# Altium PCB 400926.PcbDoc (part 4 of 7)
Units mm, origin at the board's own origin, x right, y up, seen from the top; angles counter-clockwise.
Board outline 148.5 x 63.5 mm, 4 copper layers (Top Layer, Mid-Layer 1, Mid-Layer 2, Bottom Layer), stack 1.514 mm thick; 311 components, 281 nets, 1495 pads, 2232 vias.
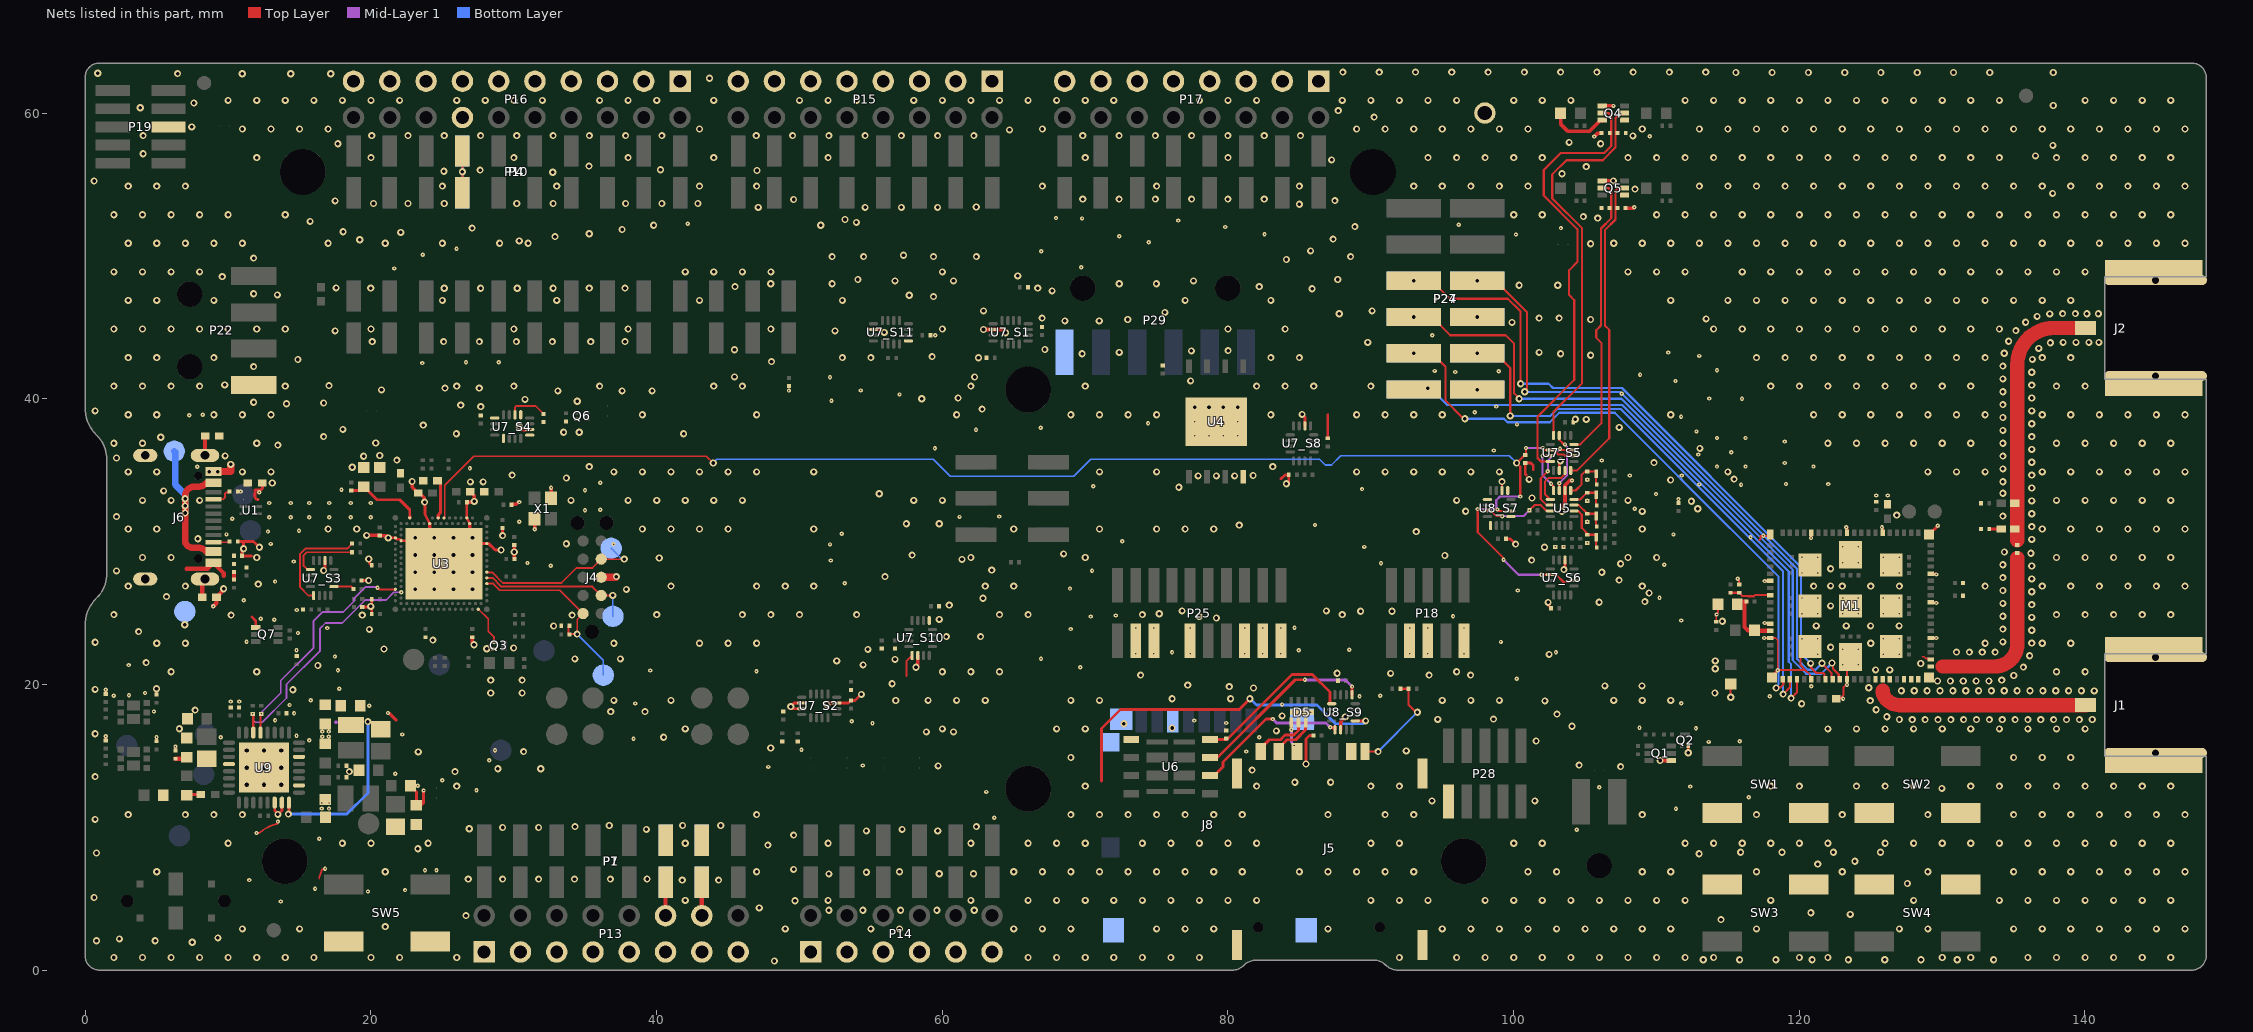
[diagram p5: the nets of this part, all layers, seen from the top]

## Via types
v1: diameter 0.5, hole 0.25, Top Layer to Bottom Layer, tented both sides, 1704 vias
v2: diameter 0.3, hole 0.1, Top Layer to Mid-Layer 1, tented top, 426 vias
v3: diameter 0.3, hole 0.1, Top Layer to Mid-Layer 1, tented both sides, 93 vias
v4: diameter 0.61, hole 0.305, Top Layer to Bottom Layer, tented both sides, 9 vias

## Nets (pads, with @x,y where several pads share a name; then routed paths per layer and width w, separated by ;. In a path a pad name is that pad's centre, name@x,y a point inside that pad or via, vN(x,y) a via of type N, cw(c..) or ccw(c..) an arc to the next point about the centre after c; other vN are vias at no path point) (continued)
GND: C1.2 C2.2 C3.2 C4.2 C5.2 C6.2 C7.2 C8.1 C9.1 C10.2 C11.1 C19.1 C24.1 C25.1 C26.2 C27.1 C28.2 C29.1 C30.2 C31.1 C32.1 C33.1 C34.2 C35.1 C36.1 C37.2 C38.2 C39.2 C40.1 C41.1 C42.1 C43.1 C44.2 C45.1 C46.1 C47.1 C48.2 C49.1 C50.1 C51.1 C52_S1.2 C52_S2.2 C52_S3.2 C52_S4.2 C52_S5.2 C52_S6.2 C52_S8.2 C52_S10.2 C52_S11.2 C53_S7.2 C53_S9.2 C54.1 C55.1 C56.1 C57.1 C58.1 C59.1 C60.1 C61.2 C62.2 C63.2 C64.1 C65.1 C66.1 C67.1 C68.1 C69.1 C70.1 C71.1 C72.1 D5.9 J1.2 J2.2 J4.3 J5.0 J5.C5 J6.A1 J6.A12 J8.0 J8.6 J8.9 M1.1 M1.7 M1.13 M1.15 M1.20 M1.25 M1.30 M1.34 M1.36 M1.38 M1.39 M1.40 M1.41 M1.43 M1.46 M1.51 M1.55 M1.60 M1.66 M1.71 M1.76 M1.105 M1.106 M1.107 M1.108 M1.109 M1.110 M1.111 M1.112 M1.113 P1.6 P1.7 P4.7 P7.6 P7.7 P10.7 P13.1 P13.3 P13.5 P13.7 P13.9 P13.11 P13.12 P13.13 P13.14 P13.15 P14.1 P14.3 P14.5 P14.7 P14.9 P14.11 P15.1 P15.3 P15.5 P15.7 P15.9 P15.11 P15.13 P15.15 P16.1 P16.3 P16.5 P16.7 P16.9 P16.11 P16.13 P16.14 P16.15 P16.17 P16.19 P17.1 P17.3 P17.5 P17.7 P17.9 P17.11 P17.13 P17.15 P18.3 P18.5 P18.9 P19.5 P22.4 P24.8 P24.12 P25.3 P25.5 P25.9 P25.15 P25.17 P25.19 P27.8 P27.12 P28.1 P29.1 Q1.1 Q2.2 Q3.2 Q4.1 Q4.4 Q5.1 Q5.4 Q6.2 Q7.1 R3.1 R7.1 R13.2 R14.1 R17.2 R18.1 R24.1 R31.2 R32.1 R36.2 R37.2 R38.1 R43.1 R44.1 R45.1 R46.1 R47.1 R59.1 R65.1 R67.2 R68.1 R70.1 R71.1 R72.2 R73.1 R74.1 R76.2 R78.1 R80.2 R81.2 R85.2 R86.2 SB19.1 SW1.1 SW2.1 SW3.1 SW4.1 SW5.1 TP18.1 TP24.1 U1.5 U1.8 U3.104 U3.A25 U3.B12 U3.B26 U3.G1 U3.H2 U3.J31 U4.4 U4.9 U5.6 U6.1 U7_S1.6 U7_S2.6 U7_S2.7 U7_S2.15 U7_S3.6 U7_S4.6 U7_S5.6 U7_S6.6 U7_S8.6 U7_S10.6 U7_S11.6 U8_S7.6 U8_S9.6 U9.2 U9.6 U9.30 U9.31 U9.33 X1.2 X1.4 | length 105
  Top Layer w0.125: v2(12,9.599) 12.14,9.599 ccw(c12.14,9.724) 12.221,9.629 cw(c13.97,7.62) 13.4,10.222 ccw(c13.373,10.344) 13.497,10.333 ccw(c12.7,10.399) v2(13.5,10.399) ; 16.4,6.399 16.4,6.503 cw(c16.525,6.502) 16.41,6.552 ccw(c13.97,7.62) 16.555,6.975 cw(c16.676,6.944) 16.618,7.055 cw(c16.8,6.699) v2(16.8,7.099) ; C1.2@114.19,24.384 114.204,24.398 114.204,24.882 v3(114.219,24.897) 114.219,24.944 114.325,25.05 C7.2@114.325,25.599 ; C3.2@115.2,19.949 115.2,19.111 v1(115.212,19.099) ; v3(115.705,27.399) 115.705,27.351 115.8,27.256 C10.2@115.8,26.984 ; 117.2,30.099 117.3,30.199 117.3,30.399 v3(117.5,30.399) 117.875,30.399 M1.1@117.975,30.499 ; v2(117.55,23.249) M1.15@117.975,23.249 118.35,23.249 118.5,23.099 v3(118.5,20.999) 120.43,20.999 ; M1.107@120.75,22.649 120.65,22.649 120.1,22.099 120.1,21.329 120.43,20.999 ; M1.25@120.85,20.374 120.763,20.461 120.763,20.667 120.43,20.999 ; C6.2@122.85,18.999 123.114,19.263 123.114,19.813 123.336,20.035 123.336,20.36 M1.30@123.35,20.374 123.35,21.674 M1.108@123.6,21.924 ; 128.642,21.944 128.744,21.944 128.87,21.817 129.157,21.817 M1.43@129.225,21.749
  Top Layer w0.15: P4.7@26.416,54.415 P4.7@26.416,57.345 ; U8_S7.6@99.2,33.574 v1(99.2,34.199)
  Top Layer w0.165: U3.A25@26.725,31.658 U3.B26@26.925,31.258
  Top Layer w0.187: v1(21.225,30.258) U3.G1@21.725,30.258 U3.G1@21.725,30.258 cw(c21.634,30.094) U3.G1@21.766,30.227 ; U3.G1@21.766,30.227 21.775,30.219 ccw(c21.907,30.351) 21.907,30.164 21.957,30.164 cw(c21.956,29.977) U3.H2@22.125,30.058 U3.104@22.825,30.058 ; v1@23.8,32.862 23.8,31.971 23.8,31.928 23.819,31.889 U3.B12@24.125,31.258
  Top Layer w0.2: R80.2@1.45,16.084 v2(1.448,16.367) ; R76.2@1.45,19.334 v2(1.448,19.617) ; R81.2@5,16.019 v2@5,16.302 ; v2(6.325,15.649) v2(6.325,15.649) C67.1@6.327,15.366 ; C54.1@7.127,12.246 7.18,12.299 C64.1@8.1,12.299 ; R70.1@10.685,29.999 11.1,29.999 ; R71.1@10.685,33.499 R71.1@10.714,33.528 ; v1@10.985,29.499 C8.1@10.985,28.999 11.65,28.999 ; v1(11.1,29.499) 11.1,29.999 ; 11.68,24.719 11.95,24.449 11.95,24.074 Q7.1@11.95,23.999 ; U1.8@12.1,32.949 cw(c12.1,33.149) 11.9,33.149 11.9,33.599 12.2,33.599 ccw(c12.2,33.824) 12.425,33.824 12.425,34.074 ccw(c12.4,34.074) C9.1@12.4,34.099 ; v1(12.2,29.599) 11.8,29.999 11.1,29.999 ; U9.30@13.275,11.724 13.275,11.166 13.5,10.941 v1(13.5,10.899) 13.775,11.174 U9.31@13.775,11.724 ; v1(16.7,27.974) 16.8,28.074 U7_S3.6@16.8,28.674 ; R24.1@19.36,27.274 v1(19.85,27.274) ; R65.1@19.4,25.414 v1@19.956,25.414 ; v1(20,25.458) 20.065,25.393 R31.2@20.065,24.924 ; v1@20.065,25.523 C26.2@20.065,25.958 ; v2(21.2,17.999) 21.219,17.98 21.294,17.98 21.787,17.486 ; C69.1@22.777,12.896 22.777,12.871 23.052,12.596 23.076,12.596 23.194,12.479 C70.1@23.194,11.548 23.245,11.599 23.583,11.599 23.7,11.716 v2@23.7,12.599 ; U3.A25@26.725,31.658 C39.2@26.725,32.754 ; v1@28.075,22.499 v1(28.125,22.499) Q3.2@28.625,22.499 ; U7_S2.7@50.175,18.299 49.55,18.299 v1(49.4,18.449) 49.65,18.699 U7_S2.6@50.175,18.699 ; v1(51.925,18.599) 52.025,18.699 U7_S2.15@52.625,18.699 53.44,18.699 C52_S2.2@53.6,18.859 ; C52_S2.2@53.625,18.884 53.91,18.884 54.15,19.124 ; U7_S11.6@55.193,44.849 55.748,44.849 v1(55.948,44.649) ; 83.725,34.399 83.996,34.67 C52_S8.2@84.268,34.67 84.268,34.217 v1(84.1,34.049) ; v1(85.2,38.899) 85.4,38.699 U7_S8.6@85.4,38.099 ; v1(85.475,14.429) 85.475,16.174 85.725,16.424 C48.2@85.99,16.424 ; 87,38.882 87.003,38.88 R38.1@87.003,37.23 ; C53_S7.2@99.482,30.191 99.783,30.191 v1(100.15,29.824) ; 100.9,34.649 100.825,34.724 R47.1@100.825,35.489 101.236,35.489 101.388,35.337 101.388,35.037 ; v1(102.429,25.743) 102.486,25.685 102.486,25.5 102.638,25.348 C52_S6.2@102.638,25.333 ; U7_S5.6@103.21,34.983 103.21,35.574 v1(103.285,35.649) ; v1(103.535,28.042) 103.61,28.117 U7_S6.6@103.61,28.708 ; R46.1@106.16,53.349 R46.1@106.195,53.314 ; v1(112.24,15.22) Q2.2@112.24,15.749 ; v3(117.588,27.236) 117.595,27.242 117.968,27.242 M1.7@117.975,27.249 ; v3(117.6,24.299) 117.619,24.28 117.944,24.28 M1.13@117.975,24.249 ; M1.20@118.1,20.499 118.35,20.749 118.35,20.832 118.5,20.982 v3(118.5,20.999) ; v3(120.838,30.248) 120.844,30.254 120.844,30.618 M1.76@120.85,30.624 ; v3(123.3,30.999) 123.35,30.949 M1.71@123.35,30.624 ; v3(125.8,30.999) 125.85,30.949 M1.66@125.85,30.624 ; M1.60@129.1,30.499 v3(129.7,31.099) ; M1.46@129.225,23.249 v3(129.605,23.248) ; M1.51@129.225,25.749 129.256,25.718 129.581,25.718 v3(129.6,25.699) ; M1.55@129.225,27.749 129.55,27.749 v3(129.6,27.699)
  Top Layer w0.225: v1(19.864,28.778) 19.917,28.725 19.917,28.496 20.065,28.348 C25.1@20.065,28.333 ; U3.104@24.125,29.858 U3.B12@24.125,31.258 ; U3.B26@26.925,31.258 26.925,29.858 U3.J31@28.125,29.858 28.275,29.858 28.725,29.408 v1(29.125,29.408) ; v1@29.225,30.425 C33.1@29.225,30.948 ; C34.2@29.86,32.574 29.86,32.588 29.882,32.611 30.176,32.611 30.331,32.765 v2(30.405,32.765) ; C30.2@30.05,29.748 v1(30.05,29.27) 30.05,28.793 C32.1@30.06,28.783
  Top Layer w0.25: C51.1@10.425,27.334 C50.1@10.425,27.864 ; v1(19.708,30.433) 19.713,30.428 20.6,30.428 C24.1@20.6,30.433 ; C24.1@20.625,30.423 20.65,30.413 20.995,30.413 cw(c20.994,30.163) v1(21.225,30.258) ; v1(22.9,34.208) 22.9,33.813 23.15,33.563 23.15,33.513 23.275,33.388 C40.1@23.325,33.388 ; C40.1@23.325,33.483 23.75,33.058 v1@23.75,32.908 ; C39.2@26.725,32.754 v1@27.196,32.754 ; C28.2@26.975,33.483 27.25,33.208 v1(27.25,32.808) ; C31.1@27.1,23.298 27.1,22.908 v1(27.229,22.778) ; v2(31.475,30.859) X1.4@31.475,31.587 ; X1.2@32.625,33.037 v2(32.625,33.766) ; R45.1@107.848,53.349 108.38,53.349 108.438,53.406 v2(108.465,53.406) ; v1(110.265,14.674) Q1.1@111.04,14.674
  Top Layer w0.254: v1(30.4,38.049) 30.6,37.849 U7_S4.6@31.125,37.849 ; v1(58.175,21.199) 58.3,21.324 U7_S10.6@58.3,22.024 ; v1(62.9,44.847) 62.902,44.849 U7_S1.6@63.575,44.849 64.225,44.849 64.475,44.599 v1(64.45,44.624) ; U8_S9.6@87.9,16.824 87.9,17.399 v1(88.225,17.724) ; 103.4,32.474 103.61,32.684 U5.6@103.61,33.574 103.612,33.576 103.612,33.936 103.95,34.274 v2(104.1,34.274) ; R59.1@103.488,29.618 103.496,29.626 v2(103.511,29.626) ; v2(105.657,58.354) 105.88,58.576 106.163,58.576 106.171,58.584 R44.1@106.171,58.599 ; Q5.4@106.25,55.249 v1(107,55.249) ; Q4.4@106.25,60.499 v2(107,60.499)
  Top Layer w0.3: 7.1,28.099 8.58,28.099 J6.A12@8.985,28.504 9.7,27.789 9.7,27.599 ; v2(8.97,25.462) 9.2,25.691 C63.2@9.2,26.099 9.7,26.599 v1(9.7,26.699) ; P13.12@40.64,3.81 P1.6@40.64,6.155 ; P13.14@43.18,3.81 P1.7@43.18,6.155
  Top Layer w0.5: J6.A1@8.985,34.904 9.295,34.904 v1(9.3,34.899) 10.2,34.899 v1(10.2,35.399) ; J4.3@36.135,27.499 v1@37.15,27.499
  Mid-Layer 1 w0.2: v3@120.838,30.221 v3(120.838,30.248)
  Mid-Layer 1 w0.25: 17.568,17.342 17.575,17.349
  Bottom Layer w0.15: P10.7@26.416,54.415 P10.7@26.416,57.345
  other v1: 48.26,0.635 113.292,0.723 115.832,0.723 118.372,0.723 120.912,0.723 123.452,0.723 125.992,0.723 128.532,0.723 131.072,0.723 133.612,0.723 2.018,0.882 4.018,0.882 6.018,0.882 8.018,0.882 10.018,0.882 12.018,0.882 14.018,0.882 16.018,0.882 20.018,0.882 22.018,0.882 26.018,0.882 66.018,0.882 68.018,0.882 70.018,0.882 72.018,0.882 74.018,0.882 76.018,0.882 78.018,0.882 92.018,0.882 96.018,0.882 98.018,0.882 100.018,0.882 102.018,0.882 104.018,0.882 106.018,0.882 108.018,0.882 110.018,0.882 112.018,0.882 114.018,0.882 120.018,0.882 122.018,0.882 130.018,0.882 132.018,0.882 136.018,0.882 138.018,0.882 140.018,0.882 142.018,0.882 144.018,0.882 146.018,0.882 7.5,1.949 0.8,2.049 4.9,2.049 2.4,2.184 9.3,2.249 11.018,2.882 15.018,2.882 49.018,2.882 55.018,2.882 57.018,2.882 65.018,2.882 67.018,2.882 69.018,2.882 75.018,2.882 77.018,2.882 79.018,2.882 87.018,2.882 95.018,2.882 97.018,2.882 99.018,2.882 101.018,2.882 103.018,2.882 105.018,2.882 107.018,2.882 109.018,2.882 111.018,2.882 117.018,2.882 127.018,2.882 129.018,2.882 135.018,2.882 137.018,2.882 139.018,2.882 141.018,2.882 143.018,2.882 145.018,2.882 147.018,2.882 21.012,3.048 114.529,3.53 26.67,3.81 123.575,3.899 120.828,4.012 52.07,4.191 54.458,4.191 57.099,4.191 59.639,4.191 62.255,4.191 47.2,4.349 49.7,4.849 42.018,4.882 52.018,4.882 62.018,4.882 66.018,4.882 68.018,4.882 70.018,4.882 72.018,4.882 74.018,4.882 76.018,4.882 78.018,4.882 80.018,4.882 82.018,4.882 90.018,4.882 92.018,4.882 94.018,4.882 98.018,4.882 100.018,4.882 102.018,4.882 104.018,4.882 106.018,4.882 108.018,4.882 110.018,4.882 112.018,4.882 118.018,4.882 128.018,4.882 134.018,4.882 136.018,4.882 138.018,4.882 140.018,4.882 142.018,4.882 144.018,4.882 146.018,4.882 0.635,5.08 127.583,6.062 41.808,6.299 44.348,6.299 26.822,6.374 29.235,6.374 31.75,6.374 34.265,6.374 36.779,6.374 39.345,6.375 52.07,6.731 59.8,6.749 62.2,6.749 54.7,6.849 5.018,6.882 21.018,6.882 47.018,6.882 57.018,6.882 65.018,6.882 67.018,6.882 69.018,6.882 71.018,6.882 73.018,6.882 75.018,6.882 77.018,6.882 79.018,6.882 81.018,6.882 85.018,6.882 87.018,6.882 89.018,6.882 91.018,6.882 93.018,6.882 101.018,6.882 103.018,6.882 109.018,6.882 111.018,6.882 117.018,6.882 123.018,6.882 129.018,6.882 135.018,6.882 137.018,6.882 139.018,6.882 141.018,6.882 143.018,6.882 145.018,6.882 147.018,6.882 49.6,7.049 121.3,7.424 123.9,7.624 113,8.149 0.8,8.199 115.9,8.249 118.8,8.249 122.4,8.249 125.7,8.249 23.3,8.499 47.8,8.749 10.018,8.882 18.018,8.882 20.018,8.882 24.018,8.882 42.018,8.882 52.018,8.882 62.018,8.882 66.018,8.882 68.018,8.882 70.018,8.882 74.018,8.882 76.018,8.882 78.018,8.882 80.018,8.882 82.018,8.882 90.018,8.882 92.018,8.882 100.018,8.882 102.018,8.882 112.018,8.882 114.018,8.882 116.018,8.882 118.018,8.882 120.018,8.882 122.018,8.882 126.018,8.882 128.018,8.882 130.018,8.882 132.018,8.882 134.018,8.882 136.018,8.882 138.018,8.882 140.018,8.882 142.018,8.882 144.018,8.882 146.018,8.882 49.6,9.449 54.7,9.749 59.7,9.749 39.3,9.849 57.2,9.849 26.9,9.899 29.235,9.982 31.75,9.982 34.3,10.049 62.4,10.049 36.7,10.124 41.834,10.124 44.501,10.124 0.7,10.549 3.018,10.882 7.018,10.882 9.018,10.882 11.018,10.882 47.018,10.882 69.018,10.882 71.018,10.882 73.018,10.882 75.018,10.882 77.018,10.882 79.018,10.882 81.018,10.882 87.018,10.882 91.018,10.882 93.018,10.882 109.018,10.882 117.018,10.882 123.018,10.882 129.018,10.882 135.018,10.882 137.018,10.882 139.018,10.882 141.018,10.882 143.018,10.882 145.018,10.882 147.018,10.882 94.3,11.849 101.5,11.849 129.997,12.724 26.018,12.882 70.018,12.882 82.018,12.882 90.018,12.882 92.018,12.882 118.018,12.882 120.018,12.882 124.018,12.882 126.018,12.882 128.018,12.882 132.018,12.882 134.018,12.882 136.018,12.882 138.018,12.882 140.018,12.882 142.018,12.882 144.018,12.882 146.018,12.882 84.7,13.149 87.2,13.149 0.7,13.549 18.5,13.899 25.9,13.899 81.7,13.999 28.9,14.099 31.9,14.099 107.5,14.249 59.725,14.299 104.6,14.349 69.018,14.882 135.018,14.882 137.018,14.882 139.018,14.882 23.325,15.274 30.7,15.299 92.5,15.349 48,15.549 101.591,16.04 40.5,16.299 0.7,16.549 58.9,16.674 60.8,16.674 83.4,16.749 6.6,16.899 42.018,16.882 60.018,16.882 68.018,16.882 70.018,16.882 122.018,16.882 124.018,16.882 126.018,16.882 128.018,16.882 130.018,16.882 132.018,16.882 134.018,16.882 136.018,16.882 138.018,16.882 140.018,16.882 76.1,16.949 104.1,17.074 72.725,17.249 94.7,17.549 127.021,17.543 127.921,17.54 128.821,17.54 129.721,17.54 130.621,17.54 131.521,17.54 132.421,17.54 133.321,17.54 134.221,17.54 135.121,17.54 136.021,17.54 136.921,17.54 137.821,17.54 138.721,17.54 139.621,17.54 140.521,17.542 98.602,17.57 126.141,17.733 83.8,17.799 103.05,17.924 36.8,18.099 39.2,18.099 7.7,18.199 125.391,18.23 120.175,18.649 102.2,18.849 56.75,18.874 124.979,18.866 37.018,18.882 41.018,18.882 59.018,18.882 61.018,18.882 63.018,18.882 69.018,18.882 71.018,18.882 95.018,18.882 97.018,18.882 99.018,18.882 107.018,18.882 109.018,18.882 111.018,18.882 76.1,18.999 80.2,18.999 54.35,19.299 28.4,19.399 30.6,19.399 114.1,19.399 140.663,19.542 127.163,19.558 128.063,19.558 128.963,19.558 129.863,19.558 130.763,19.558 131.663,19.558 132.563,19.558 133.463,19.558 134.363,19.558 135.263,19.558 136.163,19.558 137.063,19.558 137.963,19.558 138.863,19.558 139.763,19.558 14.55,19.625 0.7,19.649 5,19.699 81.8,19.749 124.879,19.766 80.1,19.849 106.4,19.899 109,19.899 77.2,19.949 56.5,20.049 129.689,20.24 130.589,20.24 131.489,20.24 132.389,20.24 133.289,20.24 28.4,20.299 30.6,20.299 134.187,20.296 135.027,20.621 73.9,20.649 94.1,20.649 97,20.649 87.65,20.784 91.4,20.774 6.018,20.882 12.018,20.882 60.018,20.882 62.018,20.882 64.018,20.882 96.018,20.882 138.018,20.882 140.018,20.882 125.35,21.014 126.35,21.014 114.125,21.099 135.702,21.215 16.3,21.325 54.468,21.361 128.513,21.464 4.275,21.525 52.625,21.649 114.125,21.649 56.7,21.749 34.29,21.789 37.482,21.789 136.14,22.002 102.5,22.099 131.02,22.258 131.92,22.258 132.82,22.258 133.72,22.261 54.8,22.449 20.929,22.478 30,22.549 122.2,22.599 5.018,22.882 7.018,22.882 37.018,22.882 43.018,22.882 45.018,22.882 47.018,22.882 125.018,22.882 133.018,22.882 136.289,22.89 137.018,22.882 139.018,22.882 0.7,22.949 134.271,22.973 24.35,23.099 60.3,23.349 62.7,23.349 3.75,23.7 136.289,23.79 19.9,23.849 134.271,23.873 32.803,24.09 121.2,24.099 123.3,24.099 125,24.099 127,24.099 6.975,24.175 114.625,24.424 59.8,24.549 79.2,24.649 136.289,24.69 78,24.749 134.271,24.773 10.225,24.85 19.4,24.849 34.1,24.849 2.018,24.882 40.018,24.882 46.018,24.882 48.018,24.882 50.018,24.882 54.018,24.882 64.018,24.882 66.018,24.882 74.018,24.882 88.018,24.882 138.018,24.882 140.018,24.882 142.018,24.882 144.018,24.882 146.018,24.882 75.2,24.949 89.3,25.124 91.5,25.124 76.8,25.149 86.9,25.149 122.2,25.499 60.5,25.549 136.289,25.59 134.271,25.673 106,25.749 109.2,25.799 62.865,26.034 5.7,26.149 109.5,26.399 136.289,26.49 134.271,26.573 37.9,26.649 23.125,26.658 24.458,26.658 25.792,26.658 27.125,26.658 3.018,26.882 7.018,26.882 41.018,26.882 47.018,26.882 49.018,26.882 51.018,26.882 63.018,26.882 65.018,26.882 109.018,26.882 121.018,26.882 123.018,26.882 125.018,26.882 127.018,26.882 133.018,26.882 137.018,26.882 139.018,26.882 141.018,26.882 143.018,26.882 145.018,26.882 147.018,26.882 122.2,26.899 12.125,27.025 107.4,27.299 136.289,27.39 134.271,27.473 37.2,27.549 56,27.549 23.125,27.858 24.458,27.858 25.792,27.858 27.125,27.858 106.193,27.856 2.2,27.949 63.474,28 122.2,28.099 136.289,28.29 134.271,28.373 107.5,28.449 101.275,28.699 61.392,28.752 40.2,28.849 4.018,28.882 6.018,28.882 12.018,28.882 62.018,28.882 70.018,28.882 108.018,28.882 110.018,28.882 138.018,28.882 140.018,28.882 142.018,28.882 144.018,28.882 146.018,28.882 95.2,29.024 23.125,29.058 24.458,29.058 25.792,29.058 27.125,29.058 57.9,29.049 68.504,29.133 136.222,29.187 134.371,29.268 102.175,29.599 33.7,29.849 136.289,30.15 7.9,30.199 23.125,30.258 24.458,30.258 25.792,30.258 27.125,30.258 29.23,30.42 93.2,30.699 3.018,30.882 5.018,30.882 17.018,30.882 19.018,30.882 39.018,30.882 41.018,30.882 43.018,30.882 45.018,30.882 51.018,30.882 65.018,30.882 71.018,30.882 75.018,30.882 77.018,30.882 79.018,30.882 109.018,30.882 137.018,30.882 139.018,30.882 141.018,30.882 143.018,30.882 145.018,30.882 147.018,30.882 136.289,31.05 80.8,31.149 57.5,31.249 59.8,31.249 2.2,31.749 134.271,31.785 126.838,31.853 136.289,31.95 109.021,32.108 96.65,32.124 103.4,32.124 112.9,32.299 23.775,32.758 112.46,32.821 136.289,32.85 4.018,32.882 6.018,32.882 8.018,32.882 34.018,32.882 38.018,32.882 40.018,32.882 42.018,32.882 44.018,32.882 46.018,32.882 58.018,32.882 60.018,32.882 96.018,32.882 108.018,32.882 138.018,32.882 140.018,32.882 142.018,32.882 144.018,32.882 146.018,32.882 101.3,33.049 55.6,33.349 134.271,33.385 5.5,33.549 136.289,33.75 76.575,33.799 13.1,34.099 26.976,34.174 27.862,34.174 134.271,34.185 111,34.313 101.1,34.349 115.45,34.374 33.7,34.449 77.925,34.599 79.2,34.599 80.475,34.599 81.775,34.624 29.9,34.649 136.289,34.65 3.018,34.882 5.018,34.882 11.018,34.882 13.018,34.882 37.018,34.882 39.018,34.882 41.018,34.882 43.018,34.882 45.018,34.882 47.018,34.882 51.018,34.882 71.018,34.882 75.018,34.882 89.018,34.882 91.018,34.882 93.018,34.882 95.018,34.882 97.018,34.882 99.018,34.882 115.018,34.882 129.018,34.882 131.018,34.882 133.018,34.882 137.018,34.882 139.018,34.882 141.018,34.882 143.018,34.882 145.018,34.882 147.018,34.882 8.7,34.899 134.271,35.085 18.7,35.199 35.3,35.249 83.15,35.249 109.838,35.523 136.289,35.55 21.825,35.708 2.2,35.849 19.5,35.974 9.8,35.999 134.271,35.985 20.625,36.024 136.289,36.45 113.05,36.524 13.5,36.749 2.018,36.882 4.018,36.882 12.018,36.882 122.018,36.882 124.018,36.882 126.018,36.882 128.018,36.882 130.018,36.882 132.018,36.882 134.271,36.885 138.018,36.882 140.018,36.882 142.018,36.882 144.018,36.882 146.018,36.882 20.35,36.899 5.3,37.299 16.7,37.349 136.289,37.35 26,37.549 41.9,37.549 33.5,37.649 34.6,37.649 134.271,37.785 18.05,37.849 107.406,37.992 23.675,38.149 136.289,38.25 104.333,38.566 105.1,38.549 134.271,38.685 3.018,38.882 5.018,38.882 9.018,38.882 11.018,38.882 13.018,38.882 39.018,38.882 47.018,38.882 61.018,38.882 69.018,38.882 71.018,38.882 73.018,38.882 75.018,38.882 83.018,38.882 89.018,38.882 91.018,38.882 93.018,38.882 95.018,38.882 111.018,38.882 121.018,38.882 123.018,38.882 125.018,38.882 127.018,38.882 129.018,38.882 131.018,38.882 133.018,38.882 137.018,38.882 139.018,38.882 141.018,38.882 143.018,38.882 145.018,38.882 147.018,38.882 0.7,39.149 136.289,39.15 62.8,39.274 77.687,39.399 78.687,39.399 79.687,39.399 80.687,39.399 27.7,39.449 26.3,39.549 134.271,39.585 14.1,39.649 16.7,39.699 11.8,39.749 34.457,39.823 30.8,39.949 58.575,39.999 61.125,40.049 136.289,40.05 134.271,40.485 33.1,40.549 37.6,40.549 39.7,40.549 20.75,40.624 97.472,40.64 25.2,40.749 27.6,40.749 2.018,40.882 4.018,40.882 6.018,40.882 8.018,40.882 14.018,40.882 26.018,40.882 30.018,40.882 36.018,40.882 44.018,40.882 46.018,40.882 62.018,40.882 70.018,40.882 82.018,40.882 84.018,40.882 86.018,40.882 90.018,40.882 118.018,40.882 120.018,40.882 122.018,40.882 124.018,40.882 126.018,40.882 128.018,40.882 130.018,40.882 132.018,40.882 138.018,40.882 140.018,40.882 17.075,40.924 136.289,40.95 9.779,40.968 77.4,41.249 134.271,41.385 45.466,41.528 62.275,41.524 136.289,41.85 11.8,42.249 134.271,42.285 48.057,42.595 14.9,42.749 136.327,42.75 3.018,42.882 5.018,42.882 9.018,42.882 53.018,42.882 55.018,42.882 62.55,42.874 83.018,42.882 85.018,42.882 117.018,42.882 119.018,42.882 121.018,42.882 123.018,42.882 125.018,42.882 127.018,42.882 129.018,42.882 131.018,42.882 133.018,42.882 137.018,42.882 139.018,42.882 59.3,42.949 105.4,43.049 69.8,43.149 103.3,43.149 134.365,43.18 72.4,43.249 101.8,43.249 77.45,43.349 80.025,43.374 45.466,43.434 67.2,43.449 136.777,43.529 137.587,43.921 89.8,43.949 138.487,43.94 139.387,43.94 140.287,43.942 140.99,43.942 20.1,43.999 25.1,43.999 27.61,43.999 30.201,43.999 32.715,43.999 35.4,43.999 37.8,43.999 134.667,44.028 17.5,44.749 52.5,44.749 135.18,44.768 2.018,44.882 4.018,44.882 6.018,44.882 8.018,44.882 10.018,44.882 12.018,44.882 14.018,44.882 20.018,44.882 30.018,44.882 38.018,44.882 48.018,44.882 60.018,44.882 80.018,44.882 84.018,44.882 114.018,44.882 116.018,44.882 118.018,44.882 120.018,44.882 122.018,44.882 124.018,44.882 126.018,44.882 128.018,44.882 130.018,44.882 132.018,44.882 134.018,44.882 99.9,45.349 135.859,45.358 68.6,45.449 71,45.449 73,45.549 105.4,45.549 113.485,45.594 67,45.649 101.8,45.649 103.2,45.649 97.472,45.72 136.664,45.761 87.8,45.949 137.546,45.938 140.148,45.949 140.951,45.949 138.446,45.958 139.346,45.958 75.6,46.049 62.9,46.149 90.1,46.149 3.018,46.882 5.018,46.882 9.018,46.882 25.018,46.882 33.018,46.882 43.018,46.882 53.018,46.882 77.018,46.882 83.018,46.882 111.018,46.882 115.018,46.882 117.018,46.882 119.018,46.882 121.018,46.882 123.018,46.882 125.018,46.882 127.018,46.882 129.018,46.882 131.018,46.882 133.018,46.882 135.018,46.882 137.018,46.882 139.018,46.882 59.4,47.149 57.7,47.249 13.462,47.268 11.8,47.349 67.7,47.549 85.9,47.699 25.146,47.73 27.686,47.73 30.251,47.73 32.766,47.73 17.572,47.756 20,47.749 35.3,47.749 37.8,47.749 66.7,47.749 45.5,47.849 82.2,47.849 100.4,47.949 103.1,47.949 48,48.049 52.3,48.049 72.4,48.049 75,48.049 56.7,48.249 60.8,48.249 77.6,48.249 54.1,48.349 87.7,48.349 9.6,48.549 65.3,48.599 2.018,48.882 4.018,48.882 6.018,48.882 8.018,48.882 42.018,48.882 44.018,48.882 46.018,48.882 48.018,48.882 60.018,48.882 108.018,48.882 110.018,48.882 112.018,48.882 116.018,48.882 118.018,48.882 120.018,48.882 122.018,48.882 124.018,48.882 126.018,48.882 128.018,48.882 130.018,48.882 132.018,48.882 134.018,48.882 136.018,48.882 138.018,48.882 140.018,48.882 84.1,49.749 11.8,49.849 52.3,49.949 54.5,49.949 59.4,49.949 62.4,49.949 88.6,49.949 57.3,50.049 85.8,50.349 105.4,50.849 3.018,50.882 5.018,50.882 7.018,50.882 9.018,50.882 11.018,50.882 17.018,50.882 21.018,50.882 25.018,50.882 29.018,50.882 31.018,50.882 107.018,50.882 109.018,50.882 111.018,50.882 113.018,50.882 115.018,50.882 117.018,50.882 119.018,50.882 121.018,50.882 123.018,50.882 125.018,50.882 127.018,50.882 129.018,50.882 131.018,50.882 133.018,50.882 135.018,50.882 137.018,50.882 139.018,50.882 141.018,50.882 143.018,50.882 145.018,50.882 147.018,50.882 30.4,51.049 19.228,51.129 87.374,51.175 32.9,51.349 35.3,51.549 22.1,51.649 18.059,51.688 37.6,51.849 27.1,51.949 88.9,52.049 39.8,52.149 51.5,52.149 54,52.349 15.756,52.418 53.2,52.549 105.9,52.649 104.9,52.749 2.018,52.882 4.018,52.882 6.018,52.882 8.018,52.882 10.018,52.882 14.018,52.882 100.018,52.882 102.018,52.882 110.018,52.882 112.018,52.882 114.018,52.882 116.018,52.882 118.018,52.882 120.018,52.882 122.018,52.882 124.018,52.882 126.018,52.882 128.018,52.882 130.018,52.882 132.018,52.882 134.018,52.882 136.018,52.882 138.018,52.882 140.018,52.882 142.018,52.882 144.018,52.882 146.018,52.882 47.124,53.394 54.61,53.394 57.15,53.394 59.69,53.394 62.391,53.424 85.014,53.618 20.193,53.666 22.606,53.666 25.146,53.666 30.226,53.666 32.766,53.666 37.846,53.666 40.386,53.666 42.901,53.666 17.5,53.849 87.503,53.872 49.6,53.949 69.85,53.975 72.39,53.975 74.93,53.975 77.47,53.975 80.01,53.975 82.55,53.975 137.744,54.38 108.512,54.681 3.018,54.882 5.018,54.882 7.018,54.882 25.018,54.882 33.018,54.882 43.018,54.882 47.018,54.882 67.018,54.882 75.018,54.882 85.018,54.882 93.018,54.882 95.018,54.882 97.018,54.882 99.018,54.882 101.018,54.882 113.018,54.882 115.018,54.882 117.018,54.882 119.018,54.882 121.018,54.882 123.018,54.882 125.018,54.882 127.018,54.882 129.018,54.882 131.018,54.882 133.018,54.882 135.018,54.882 137.018,54.882 139.018,54.882 141.018,54.882 143.018,54.882 145.018,54.882 147.018,54.882 0.635,55.245 103.4,55.749 32.741,55.854 26.416,55.89 25.121,55.93 47.041,55.981 27.661,56.006 40.284,56.031 105.1,56.249 35.281,56.285 87.274,56.717 12.018,56.882 20.018,56.882 30.018,56.882 38.018,56.882 44.018,56.882 52.018,56.882 70.018,56.882 80.018,56.882 94.018,56.882 96.018,56.882 98.018,56.882 100.018,56.882 102.018,56.882 108.018,56.882 110.018,56.882 112.018,56.882 114.018,56.882 116.018,56.882 118.018,56.882 120.018,56.882 122.018,56.882 124.018,56.882 126.018,56.882 128.018,56.882 130.018,56.882 132.018,56.882 134.018,56.882 138.018,56.882 140.018,56.882 142.018,56.882 144.018,56.882 146.018,56.882 136.55,56.999 4.064,57.15 137.77,57.733 17.7,57.849 106.1,57.849 103.9,57.949 108.367,58.399 4.064,58.42 20.066,58.42 22.606,58.42 25.146,58.42 27.686,58.42 30.226,58.42 32.766,58.42 35.306,58.42 37.846,58.42 40.386,58.42 46.99,58.42 49.53,58.42 52.07,58.42 54.61,58.42 57.15,58.42 59.69,58.42 62.23,58.42 69.85,58.42 72.39,58.42 74.93,58.42 77.47,58.42 80.01,58.42 82.55,58.42 85.09,58.42 64.719,58.825 11.018,58.882 13.018,58.882 15.018,58.882 17.018,58.882 43.018,58.882 67.018,58.882 89.018,58.882 91.018,58.882 93.018,58.882 95.018,58.882 97.018,58.882 99.018,58.882 101.018,58.882 109.018,58.882 113.018,58.882 115.018,58.882 117.018,58.882 119.018,58.882 121.018,58.882 123.018,58.882 125.018,58.882 127.018,58.882 129.018,58.882 131.018,58.882 133.018,58.882 135.018,58.882 137.018,58.882 139.018,58.882 141.018,58.882 143.018,58.882 145.018,58.882 147.018,58.882 7.467,59.03 90.246,59.714 87.732,60.172 3.861,60.376 137.795,60.527 7.62,60.706 10.018,60.882 12.018,60.882 14.018,60.882 16.018,60.882 18.018,60.882 20.018,60.882 22.018,60.882 26.018,60.882 28.018,60.882 30.018,60.882 32.018,60.882 36.018,60.882 38.018,60.882 40.018,60.882 44.018,60.882 50.018,60.882 52.018,60.882 54.018,60.882 58.018,60.882 60.018,60.882 62.018,60.882 64.018,60.882 66.018,60.882 68.018,60.882 70.018,60.882 72.018,60.882 78.018,60.882 80.018,60.882 82.018,60.882 88.018,60.882 90.018,60.882 92.018,60.882 94.018,60.882 96.018,60.882 100.018,60.882 102.018,60.882 104.018,60.882 112.018,60.882 114.018,60.882 116.018,60.882 118.018,60.882 120.018,60.882 122.018,60.882 124.018,60.882 126.018,60.882 128.018,60.882 130.018,60.882 132.018,60.882 134.018,60.882 140.018,60.882 142.018,60.882 144.018,60.882 146.018,60.882 43.713,62.433 6.477,62.763 11,62.749 14.4,62.749 17.2,62.749 0.889,62.789 115.57,62.84 118.11,62.84 120.65,62.84 123.19,62.84 125.73,62.84 128.27,62.84 130.81,62.84 133.35,62.84 137.795,62.839 88.061,62.863 90.601,62.863 93.141,62.863 95.681,62.863 98.221,62.863 100.761,62.863 103.301,62.863 105.841,62.863 108.381,62.863 110.921,62.863 113.461,62.863
  other v2: 13.7,4.799 19.8,5.499 22.4,5.599 16.1,5.699 11.5,6.299 23.8,6.999 24.6,6.999 16.4,9.199 63.65,10.674 16.575,11.309 17.075,11.309 16.575,11.699 17.075,11.699 63.1,12.474 23.697,12.572 27.4,12.599 23.3,12.899 25,13.299 21.72,13.754 47.825,14.224 54.45,14.324 28.3,14.699 81.3,15.299 28.7,15.399 50.15,15.424 15.7,16.099 38.4,16.199 4.998,16.302 9.5,16.299 82.2,16.299 16.6,16.349 17.05,16.349 14.8,16.399 22.2,16.499 16.6,16.699 17.05,16.699 55.125,17.274 79.9,17.299 53.675,17.424 77.65,17.469 13.3,17.499 14.631,17.973 84.6,18.049 85.2,18.049 85.8,18.049 4.822,18.102 19.9,18.499 14.316,18.557 83.8,18.599 38.514,18.671 10.2,18.799 10.8,18.799 15.8,18.899 2,19.199 3.075,19.25 4.2,19.4 17.8,19.699 100.225,20.399 47,20.924 39.575,20.974 17.7,20.999 69.675,21.199 3.063,21.353 66.925,21.799 17.491,21.949 73.555,22.149 74.825,22.149 77.365,22.149 81.175,22.149 82.445,22.149 83.715,22.149 92.73,22.149 94,22.149 96.54,22.149 76.1,22.249 102.975,22.249 14.8,22.399 84.975,22.399 88.5,22.424 11.306,22.982 99.125,22.974 14.9,23.599 69,23.874 16.953,23.946 73.555,23.949 74.825,23.949 77.365,23.949 81.175,23.949 82.445,23.949 83.715,23.949 92.73,23.949 94,23.949 96.54,23.949 13.252,24.527 12.3,24.599 70.4,24.749 95.775,24.774 72.15,24.824 14.824,25.21 11.1,25.899 110.225,26.074 100.3,26.574 68.953,26.707 53.175,27.074 13.3,27.199 70.5,27.949 32.6,28.299 110.55,28.374 30.975,28.499 14.6,28.599 52.2,28.674 102.927,29.626 52.15,29.799 37,29.824 12.995,29.837 105.174,29.905 72.612,30.026 9.9,30.499 111.2,30.499 52.975,30.549 12.8,30.699 14.975,30.749 105.174,31.378 30.387,31.394 10.3,31.599 12.9,31.699 14.4,31.699 15.7,31.699 17.1,31.699 18.6,31.699 20,31.699 61.225,31.724 64,31.749 35,32.199 36.075,32.224 108.5,32.299 12.9,32.699 14.4,32.699 15.7,32.699 17.1,32.699 18.6,32.699 20,32.699 105.174,32.851 111.55,32.974 125.4,33.224 126.2,33.224 109.982,33.324 12.2,33.449 10.9,33.499 35,33.599 17.945,33.637 115.937,33.986 113,33.999 119.077,34.029 122.047,34.026 36.073,34.118 105.174,34.325 108.15,34.624 111.785,34.619 26.945,35.137 7.845,35.237 114.25,35.249 116.25,35.249 121,35.249 119,35.499 106.175,35.674 112.947,36.091 115.25,36.249 98.625,36.374 119,36.999 114.25,37.249 116.25,37.249 77.687,37.399 78.687,37.399 79.687,37.399 80.687,37.399 112.81,37.713 100.25,38.199 74.422,38.277 77.687,38.399 78.687,38.399 79.687,38.399 80.687,38.399 111.735,38.734 7.303,38.836 8.242,38.887 97.3,39.049 98.8,39.449 113.699,40.014 116,39.999 107.58,40.342 111.345,41.24 108.864,41.68 95.925,41.874 98.975,41.924 94.5,41.949 114.25,41.999 23.6,42.499 26.67,42.545 28.956,42.545 113,42.999 110.846,43.23 94.325,44.449 94.55,46.974 21.65,49.124 69.75,49.199 23.647,50.088 66.95,50.324 26.01,50.494 74.475,50.949 72.4,51.374 100.175,51.499 82.575,51.524 103.325,51.949 79.825,52.024 96.175,52.174 42.189,52.247 76.525,52.474 69.8,52.624 67.975,52.649 109.544,58.379
  other v3: 104.425,9.824 111.375,11.299 116.475,12.099 106,12.799 112.375,12.849 113.67,15.974 115.85,16.024 112.775,16.924 108.825,16.974 111.75,18.674 123.075,18.999 89.225,19.174 117.95,19.174 90.675,19.199 120.85,19.874 123.35,19.974 123.05,21.374 124.15,21.374 121.3,22.099 125.9,22.099 127,22.099 123.05,22.474 124.15,22.474 120.2,23.199 121.3,23.199 125.9,23.199 127,23.199 84.675,23.974 111.75,24.474 120.2,24.949 121.3,24.949 123.05,24.949 124.15,24.949 125.9,24.949 127,24.949 120.2,26.049 121.3,26.049 123.05,26.049 124.15,26.049 125.9,26.049 127,26.049 120.2,27.799 121.3,27.799 125.9,27.799 127,27.799 90.725,28.474 123.05,28.524 124.15,28.524 120.2,28.899 121.3,28.899 125.9,28.899 127,28.899 89.55,29.624 123.05,29.624 124.15,29.624 116.6,30.299 86.108,31.158 89.4,33.674 70.575,33.874 59.498,36.524 62.375,37.824 66.9,37.974 52.25,39.849 57.025,40.299 49.275,40.574 54.308,40.583 52.15,41.499 59.525,44.449
  other v4: 11.325,12.974 12.525,12.974 13.725,12.974 11.325,14.174 12.525,14.174 13.725,14.174 11.325,15.374 12.525,15.374 13.725,15.374
GPS_RF1: C12.2 M1.42 | length 12.1
  Top Layer w1: 130.05,21.249 133.68,21.249 ccw(c133.68,22.849) 135.28,22.849 135.28,28.849
GPS_RF2: C12.1 J2.1 L3.2 L4.1 | length 18.6
  Top Layer w1: 135.28,30.089 135.28,30.879 135.28,42.409 cw(c137.82,42.409) 137.82,44.949 139.85,44.949 J2.1@140.1,44.949
IMCU_LED: Q3.1 U3.AL29 | length 2.8
  Top Layer w0.125: U3.AL29@27.525,25.234 27.578,25.234 28.221,24.591 28.221,23.728 28.625,23.324 Q3.1@28.625,22.949
IMCU_RESET: C41.2 J4.10 R34.1 TP14.1 U3.AC31 | length 14.1
  Top Layer w0.125: U3.AC31@28.125,27.058 28.585,27.058 29.044,26.599 33.225,26.599 J4.10@34.865,24.959 34.45,24.544 v1(34.45,23.524) 33.86,23.524 33.835,23.499 C41.2@33.835,24.099
  Bottom Layer w0.125: v1(34.45,23.524) 36.283,21.691 TP14.1@36.283,20.649
IMCU_SCL: R84.1 U3.AF2 U9.14 | length 17.4
  Top Layer w0.15: v2(11.737,17.931) 11.775,17.893 U9.14@11.775,16.624
  Mid-Layer 1 w0.125: v2(11.737,17.931) 11.75,17.918 11.75,17.499 11.9,17.349 12.4,17.349 14.1,19.049 14.1,19.999 16.45,22.349 16.45,23.921 16.829,24.3 17.999,24.3 19.611,25.911 21.076,25.911 21.622,26.458 v2(22.125,26.458)
IMCU_SDA: R83.1 U3.AE1 U9.13 | length 16.3
  Top Layer w0.125: v2(20.475,26.774) 20.6,26.649 21.709,26.649 21.712,26.645 U3.AE1@21.725,26.658
  Top Layer w0.15: U9.13@12.275,16.624 12.275,17.871 12.335,17.931 v2(12.337,17.931)
  Mid-Layer 1 w0.125: v2(12.337,17.931) 12.351,17.946 12.351,18.05 13.7,19.399 13.7,20.274 16,22.574 16,24.461 16.6,25.061 18.054,25.061 18.832,25.84 18.832,26.033 19.61,26.812 20.39,26.812 20.428,26.774 v2(20.475,26.774)
IMCU_SWDCLK: J4.4 TP15.1 U3.W31 | length 11.9
  Top Layer w0.125: U3.W31@28.125,27.858 28.144,27.839 28.511,27.839 29.251,27.099 33.35,27.099 34.4,28.149 35.515,28.149 J4.4@36.135,28.769 v1(37.745,28.769)
  Bottom Layer w0.125: TP15.1@36.83,29.528 37.589,28.769 v1(37.745,28.769)
IMCU_SWDIO: J4.2 TP13.1 U3.AA31 | length 10.8
  Top Layer w0.125: U3.AA31@28.125,27.458 28.538,27.458 29.147,26.849 35.515,26.849 J4.2@36.135,26.229 v1(36.945,26.229)
  Bottom Layer w0.125: v1(36.945,26.229) 36.945,24.777 TP13.1@36.957,24.765
"IN 3-4_S4": R32.2 U7_S4.10 | length 2.8
  Top Layer w0.125: U7_S4.10@30.1,38.874 30.1,39.399 30.2,39.499 31.535,39.499 R32.2@32.1,38.934
INT_EXT: R50.1 U5.11 U8_S7.11 | length 4.8
  Top Layer w0.15: U8_S7.11@98.428,32.149 98.799,31.779 v2(99.215,31.779) ; v2(101.118,32.197) 101.47,32.548 ; 101.47,32.549 101.91,32.549 102.31,32.149 U5.11@102.585,32.149
  Mid-Layer 1 w0.15: v2(99.215,31.779) 100.7,31.779 v2(101.118,32.197)
IOEXP_CTRL: R47.2 U3.A17 U7_S5.2 U7_S5.10 U7_S6.2 U7_S6.10 U8_S7.2 | length 102.2
  Top Layer w0.125: U3.A17@25.125,31.658 25.125,31.685 25.175,31.735 25.175,33.933 27.216,35.974 43.5,35.974 v1(43.975,35.499)
  Top Layer w0.152: v2(97.5,32.274) 97.5,30.644 99.28,28.864 99.28,28.76 v2(99.308,28.732) ; v2(98.875,32.249) 98.975,32.149 U8_S7.2@99.825,32.149 ; v2(100.475,33.149) 100.475,35.249 v1(100.225,35.499) 100.785,36.059 R47.2@100.825,36.059 100.875,36.109 v2(100.875,36.549) ; v2(101.966,27.683) U7_S6.10@102.585,27.683 102.997,27.683 103.505,27.175 103.872,27.175 103.979,27.283 U7_S6.2@104.235,27.283 ; v2(102.05,36.549) 102.191,36.408 U7_S5.2@102.585,36.408 102.84,36.408 103.147,36.1 103.517,36.1 103.61,36.008 U7_S5.10@104.235,36.008
  Mid-Layer 1 w0.152: v2(97.5,32.274) v2@98.85,32.274 ; v2@98.864,32.238 v2(98.875,32.249) v2@98.85,32.274 ; v2(99.308,28.732) 100.357,27.683 v2(101.966,27.683) ; v2(100.475,33.149) 99.053,33.149 98.799,32.894 98.799,32.325 v2@98.85,32.274 ; v2(100.875,36.549) v2(102.05,36.549)
  Bottom Layer w0.125: v1(43.975,35.499) 44.233,35.757 59.391,35.757 60.575,34.574 69.225,34.574 70.408,35.757 86.423,35.757 86.819,35.361 87.262,35.361 87.908,36.007 99.716,36.007 v1(100.225,35.499)
LED1: Q4.2 R43.2 U7_S5.16 | length 28
  Top Layer w0.15: U7_S5.16@102.81,37.433 102.81,39.092 104.81,41.092 104.81,51.928 102.72,54.017 102.72,55.706 103.714,56.699 106.25,56.699 107.149,57.598 107.149,59.656 107.392,59.899 107.65,59.899 Q4.2@107.75,59.999
LED1_EXT: U5.7 U7_S5.15 | length 4.4
  Top Layer w0.15: U5.7@103.21,33.574 v2(103.21,34.085) ; U7_S5.15@103.21,37.433 103.21,37.124 103.535,36.799 v2(103.61,36.799)
  Mid-Layer 1 w0.15: v2(103.21,34.085) 103.76,34.635 103.76,36.649 v2(103.61,36.799)
LED2: Q4.5 R44.2 U7_S5.4 | length 31.9
  Top Layer w0.15: U7_S5.4@102.585,35.608 101.931,35.608 101.685,35.854 101.685,38.745 104.26,41.32 104.26,46.906 103.9,47.266 103.9,48.999 104.475,49.574 104.475,51.874 102.125,54.224 102.125,56.013 103.311,57.199 106.361,57.199 106.851,57.689 106.851,59.802 106.655,59.999 106.25,59.999 Q4.5@106.349,59.9
LED2_EXT: U5.8 U7_S5.3 | length 3.3
  Top Layer w0.15: v2(102.035,35.999) 102.044,36.008 U7_S5.3@102.585,36.008 ; v2(102.635,34.049) 102.81,33.874 U5.8@102.81,33.574
  Mid-Layer 1 w0.15: v2(102.035,35.999) 102.035,34.649 v2(102.635,34.049)
LED3: Q5.2 R45.2 U7_S5.8 | length 22.1
  Top Layer w0.15: U7_S5.8@104.01,34.983 104.459,34.983 106.704,37.228 106.704,44.82 106.402,45.122 106.402,51.801 107.149,52.548 107.149,54.552 107.345,54.749 Q5.2@107.75,54.749
LED3_EXT: U5.9 U7_S5.7 | length 3.3
  Top Layer w0.15: U5.9@102.585,32.949 102.201,33.332 102.201,34.191 102.469,34.458 103.344,34.458 103.61,34.724 U7_S5.7@103.61,34.983
LED4: Q5.5 R46.2 U7_S5.12 | length 20.2
  Top Layer w0.15: U7_S5.12@104.235,36.808 104.684,36.808 106.154,38.278 106.154,43.911 105.802,44.263 105.802,44.327 105.801,44.328 105.801,44.8 106.125,45.124 106.125,51.916 106.851,52.643 106.851,54.552 106.655,54.749 106.25,54.749 Q5.5@106.349,54.65
LED4_EXT: U5.10 U7_S5.11 | length 5.9
  Top Layer w0.15: v2(102.41,34.924) 101.91,34.424 101.91,32.971 102.331,32.549 U5.10@102.585,32.549 ; v2(103.26,36.499) 103.351,36.408 U7_S5.11@104.235,36.408
  Mid-Layer 1 w0.15: v2(102.41,34.924) 102.41,35.649 v2(103.26,36.499)
LTE_RF1: J1.1 M1.35 | length 14.7
  Top Layer w1: 125.85,19.552 ccw(c126.703,19.552) 126.1,18.949 ccw(c127.066,19.915) 127.066,18.549 J1.1@140.05,18.549
MAGPIO0: M1.21 P24.9 P27.9 | length 42.8
  Top Layer w0.15: v1(93.027,43.18) 94.294,43.18 95.25,42.224 95.25,39.849 96.364,38.735 96.369,38.735 96.505,38.599 v1(96.6,38.599) ; v1(118.387,19.749) 118.442,19.804 118.705,19.804 118.884,19.983 118.884,20.34 M1.21@118.85,20.374
  Bottom Layer w0.15: v1(96.6,38.599) 99.339,38.599 99.589,38.349 102.539,38.349 103.205,39.016 107.089,39.016 111.53,34.574 111.536,34.574 111.8,34.31 111.8,34.304 118.562,27.542 118.562,20.019 118.387,19.844 v1(118.387,19.749)
MAGPIO1: M1.22 P24.10 P27.10 | length 39.9
  Top Layer w0.15: v1(97.472,43.18) 98.744,43.18 99.775,42.149 v1(99.775,38.799) ; v1(118.883,19.316) 119.35,19.784 M1.22@119.35,20.374
  Bottom Layer w0.15: v1(99.775,38.799) 102.6,38.799 103.091,39.291 107.497,39.291 118.883,27.905 v1(118.883,19.316)
MAGPIO2: M1.23 P24.11 P27.11 | length 42
  Top Layer w0.15: v1(119.444,19.041) 119.85,19.447 M1.23@119.85,20.374
  Bottom Layer w0.15: P27.11@93.027,40.64 94.297,40.64 95.388,39.549 101.492,39.549 101.508,39.566 107.611,39.566 119.275,27.902 119.275,21.585 119.444,21.416 v1(119.444,19.041)
  other v1: 94,40.749
MIPI_SCLK: M1.28 P24.6 P27.6 | length 44.2
  Top Layer w0.15: v1(97.472,48.26) 98.739,48.26 100.96,46.039 100.96,40.751 100.789,40.58 v1(100.789,40.488) ; v1(121.6,21.477) 121.6,21.464 121.929,21.135 122.275,20.789 122.275,20.449 M1.28@122.35,20.374
  Bottom Layer w0.15: v1(100.789,40.488) 100.803,40.474 107.481,40.474 119.85,28.105 119.85,21.788 120.614,21.024 121.147,21.024 v1(121.6,21.477)
MIPI_SDATA: M1.27 P24.5 P27.5 | length 47.2
  Top Layer w0.15: v1(93.027,48.26) 94.289,48.26 95.55,46.999 99.611,46.999 100.5,46.11 v1(100.5,41.049) ; v1(120.8,21.474) 120.848,21.426 120.848,21.151 121.2,20.799 121.687,20.799 121.775,20.711 121.775,20.449 M1.27@121.85,20.374
  Bottom Layer w0.15: v1(100.5,41.049) 102.464,41.049 102.764,40.749 107.595,40.749 120.125,28.219 120.125,22.149 v1(120.8,21.474)
MIPI_VIO: M1.29 P24.7 P27.7 | length 47
  Top Layer w0.15: v1(93.027,45.72) 94.304,45.72 95.575,44.449 99.45,44.449 100.05,43.849 100.05,40.385 100.4,40.035 v1(100.4,39.999) ; v1(122.3,21.499) 122.367,21.432 122.367,21.099 122.775,20.691 122.775,20.449 M1.29@122.85,20.374
  Bottom Layer w0.15: v1(100.4,39.999) 107.567,39.999 119.55,28.016 119.55,21.699 120.5,20.749 121.55,20.749 v1(122.3,21.499)
NC.CH1_S3: R22.2 U7_S3.1 | length 1.4
  Top Layer w0.15: U7_S3.1@17.425,26.849 18.624,26.849 R22.2@18.79,26.683
NC.CH1_S4: U7_S4.1
NC.CH1_S7: U8_S7.1
NC.CH1_S9: C49.2 U6.8 U8_S9.1 | length 11.7
  Top Layer w0.2: U6.8@78.75,16.154 79.955,16.154 84.5,20.699 85.915,20.699 87.146,19.468 87.146,18.778 U8_S9.1@87.275,18.649
NC.CH2_S4: U7_S4.5
NC.CH2_S7: U8_S7.5
NC.CH2_S9: U6.6 U8_S9.5 | length 11.1
  Top Layer w0.2: U6.6@78.75,13.614 79.05,13.614 79.675,14.239 79.675,14.574 82.675,17.574 v2(83.15,17.574) ; v2(87.175,16.999) 87.325,16.999 U8_S9.5@87.5,16.824 U8_S9.5@87.5,17.049
  Mid-Layer 1 w0.2: v2(83.15,17.574) 83.425,17.299 86.875,17.299 v2(87.175,16.999)
NC.CH2_S10: SB21.1 U7_S10.5 | length 1.6
  Top Layer w0.15: SB21.1@57.5,20.587 SB21.1@57.5,20.599 57.5,21.624 U7_S10.5@57.9,22.024
NC.CH3_S3: R20.2 U7_S3.9 | length 4.8
  Top Layer w0.125: U7_S3.9@15.775,28.049 15.55,28.049 15.3,28.299 15.3,29.043 15.515,29.258 R20.2@18.69,29.258
NC.CH3_S4: U7_S4.9
NC.CH3_S7: U8_S7.9
NC.CH3_S9: SB13.2 SB14.2 U8_S9.9 | length 24.5
  Top Layer w0.2: SB14.2@71.162,13.249 71.162,16.911 72.5,18.249 80.8,18.249 v1(81.55,18.999) ; U8_S9.9@88.925,17.449 v1(89.65,17.449)
  Bottom Layer w0.2: v1(81.55,18.999) 82,18.549 86.25,18.549 87.55,17.249 89.45,17.249 v1(89.65,17.449)
NC.CH4_S3: R19.2 U7_S3.13 | length 7.5
  Top Layer w0.125: U7_S3.13@16,26.224 15.625,26.224 15.05,26.799 15.05,29.146 15.412,29.508 18.34,29.508 R19.2@18.69,29.858
NC.CH4_S4: U7_S4.13
NC.CH4_S7: U8_S7.13
NC.CH4_S9: U6.7 U8_S9.13 | length 13
  Top Layer w0.2: U6.7@78.75,14.884 79.285,14.884 84.725,20.324 v2(85.4,20.324) ; U8_S9.13@88.7,19.274 v2(88.7,19.849)
  Mid-Layer 1 w0.2: v2(85.4,20.324) 85.415,20.309 88.24,20.309 v2(88.7,19.849)
NC.CH4_S10: U7_S10.13
NC.CH4_S11: U7_S11.13
NetC7_1: C7.1 FB1.2 M1.14 R1.1 | length 4.5
  Top Layer w0.3: C7.1@115.675,25.599 115.875,25.799 R1.1@116.315,25.799 116.175,25.659 116.175,24.024 116.4,23.799 FB1.2@116.875,23.799 116.925,23.749 M1.14@117.975,23.749
NetC8_2: C8.2 C9.2 C50.2 FB2.1 J6.A4 J6.A9 TP17.1 U1.1 | length 12.5
  Top Layer w0.45: J6.A9@8.985,29.299 8.489,29.299 ccw(c7.915,28.809) 7.896,29.564 7.535,29.564 cw(c7.535,30.099) 7,30.099 v1(7,31.999) v1(7,32.499) v1(7,32.999) 7,33.199 cw(c7.635,33.199) 7.635,33.834 7.896,33.834 ccw(c7.915,34.589) 8.489,34.099 J6.A4@8.985,34.099
  Bottom Layer w0.45: TP17.1@6.248,36.323 6.3,36.271 6.3,33.999 7,33.299 v1(7,32.999) v1(7,32.499) v1(7,31.999)
NetC10_1: C10.1 M1.9 R2.2 | length 2.9
  Top Layer w0.15: R2.2@115.125,26.474 115.14,26.474 R2.2@115.2,26.414 C10.1@115.8,26.414 ; C10.1@115.875,26.339 116.015,26.199 116.411,26.199 116.434,26.176 116.83,26.176 116.903,26.249 M1.9@117.975,26.249
NetC19_2: C19.2 L4.2 | length 0.8
  Top Layer w0.203: C19.2@133.315,30.879 L4.2@134.155,30.879
NetC36_2: C36.2 U3.A15 | length 2.7
  Top Layer w0.225: C36.2@24.675,34.263 24.875,34.063 24.875,32.008 24.725,31.858 U3.A15@24.725,31.658
NetC37_1: C37.1 R21.2 U3.A5 | length 5.3
  Top Layer w0.15: U3.A5@22.725,31.658 U3.A5@22.75,31.683
  Top Layer w0.18: U3.A5@22.745,31.683 22.745,31.773
  Top Layer w0.2: R21.2@18.625,33.564 19.794,33.564 20.434,32.923 22.026,32.923 22.725,32.224 U3.A5@22.725,31.658
NetC44_1: C44.1 D1.3 R53.1 U5.2 | length 3.6
  Top Layer w0.15: U5.2@104.235,32.149 104.516,32.149 104.78,31.886 104.78,30.961 105.174,30.567 C44.1@105.174,30.475 D1.3@105.784,30.475 ; D1.3@105.789,30.317 105.789,29.62 R53.1@105.829,29.58
NetC45_2: C45.2 D2.3 R55.1 U5.3 | length 2.6
  Top Layer w0.15: U5.3@104.235,32.549 104.581,32.549 C45.2@105.182,31.948 ; C45.2@105.174,31.948 C45.2@105.182,31.948 ; D2.3@105.784,31.948 C45.2@105.182,31.948 ; D2.3@105.789,31.79 105.789,31.094 R55.1@105.829,31.054
NetC46_2: C46.2 D3.3 R57.1 U5.4 | length 2.5
  Top Layer w0.15: U5.4@104.235,32.949 104.67,32.949 105.142,33.421 C46.2@105.174,33.421 D3.3@105.784,33.421 ; D3.3@105.789,33.263 105.789,32.567 R57.1@105.829,32.527
NetC47_2: C47.2 D4.3 R61.1 U5.5 | length 3.5
  Top Layer w0.15: U5.5@104.01,33.574 104.34,33.574 104.771,34.005 104.771,34.668 104.997,34.895 C47.2@105.174,34.895 D4.3@105.784,34.895 ; D4.3@105.789,34.737 105.789,34.04 R61.1@105.829,34
NetC57_2: C57.2 C67.2 FB4.1 U9.20 | length 0.9
  Top Layer w0.3: C67.2@6.327,14.796 7.027,14.796 ccw(c7.027,14.896) C57.2@7.127,14.896
NetC59_2: C59.2 C71.2 FB6.1 L8.1 U9.32 | length 12
  Top Layer w0.2: v1(14.234,10.923) 14.275,10.964 U9.32@14.275,11.724
  Bottom Layer w0.2: v1(14.234,10.923) 18.324,10.923 19.8,12.399 v1(19.8,17.399)
NetC61_1: C61.1 C63.1 J6.SHLD | length 2.7
  Top Layer w0.3: C63.1@8.2,26.099 8.2,27.184 J6.SHLD@8.395,27.379 ; J6.SHLD@8.395,36.029 8.4,36.034 C61.1@8.4,37.399
NetC70_2: C70.2 FB5.2 SB33.1
NetD5_1: D5.1 J5.C2 | length 1.7
  Top Layer w0.2: v2(84.45,16.824) D5.1@84.45,17.324
  Mid-Layer 1 w0.2: v2(84.45,16.824) 84.45,15.924 v2(84.65,15.724)
NetD5_2: D5.2 J5.C3 | length 3.9
  Top Layer w0.2: J5.C3@82.3,15.299 82.3,15.524 82.9,16.124 83.69,16.124 84.015,16.449 84.619,16.449 84.95,16.78 D5.2@84.95,17.324
NetD5_3: D5.3 J5.C7 | length 3.2
  Top Layer w0.2: J5.C7@83.57,15.299 83.57,15.544 84.15,16.124 84.753,16.124 85.45,16.821 D5.3@85.45,17.324
NetJ5_CD: J5.CD R62.2 R63.2 | length 7.4
  Top Layer w0.15: J5.CD@89.6,15.299 v1(90.525,15.299) ; R63.2@92.085,19.699 R62.2@92.665,19.699 92.665,18.559 93.175,18.049 v1(93.275,18.049)
  Bottom Layer w0.15: v1(90.525,15.299) v1(93.275,18.049)
NetJ6_A5: J6.A5 R71.2 | length 1.5
  Top Layer w0.125: J6.A5@8.985,32.954 8.999,32.968 9.669,32.968 9.8,33.099 9.8,33.367 9.873,33.441 10.057,33.441 R71.2@10.115,33.499
NetJ6_B5: J6.B5 R70.2 | length 1.1
  Top Layer w0.125: J6.B5@8.985,29.954 10.07,29.954 R70.2@10.115,29.999
NetLED1_1: LED1.1 Q4.6 | length 4.1
  Top Layer w0.254: LED1.1@103.301,59.999 103.301,59.24 103.827,58.715 105.304,58.715 Q4.6@106.039,59.451 ; Q4.6@106.202,59.451 Q4.6@106.25,59.499